# Altium PCB Copy of MB1363.PcbDoc (part 5 of 6)
Units mm, origin at the board's own origin, x right, y up, seen from the top; angles counter-clockwise.
Board outline 60.78 x 109.88 mm, 4 copper layers (Top Layer, Signal Layer 1, Signal Layer 2, Bottom Layer), stack 0.453 mm thick; 231 components, 215 nets, 716 pads, 2915 vias.
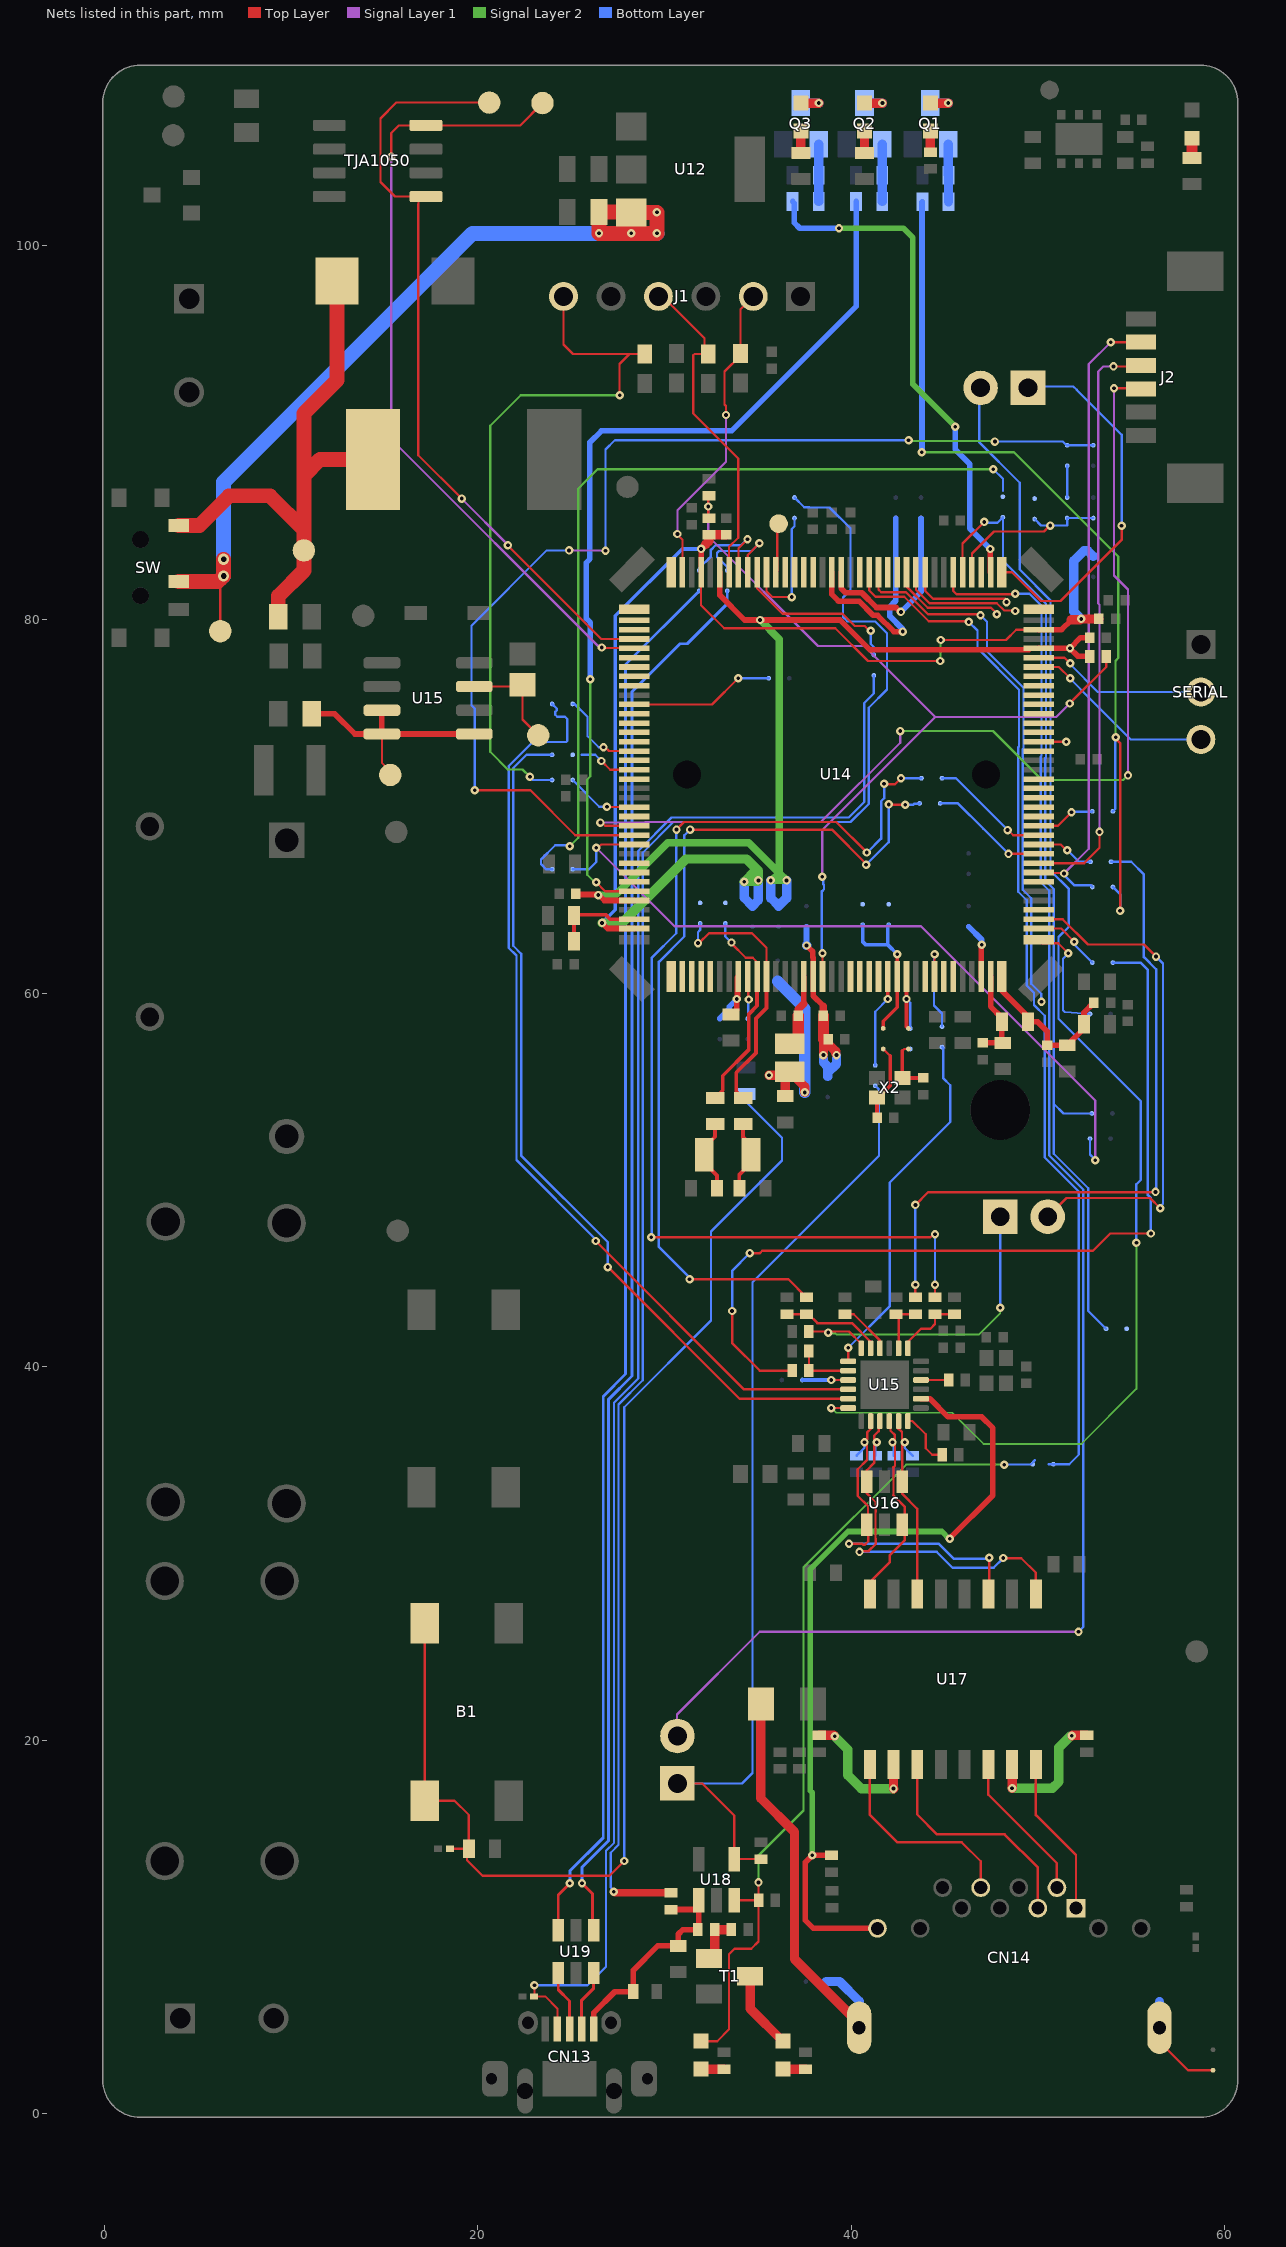
[diagram p6: the nets of this part, all layers, seen from the top]

## Via types
v1: diameter 0.45, hole 0.2, Top Layer to Bottom Layer, tented both sides, 2902 vias
v2: diameter 0.6, hole 0.3, Top Layer to Bottom Layer, tented both sides, 13 vias

## Nets (pads, with @x,y where several pads share a name; then routed paths per layer and width w, separated by ;. In a path a pad name is that pad's centre, name@x,y a point inside that pad or via, vN(x,y) a via of type N, cw(c..) or ccw(c..) an arc to the next point about the centre after c; other vN are vias at no path point) (continued)
NetCN14_12: CN14.12 R60.2 U15.2@43.741,38.279 | length 43.9
  Top Layer w0.3: R60.2@38.941,13.823 38.935,13.829 v1(37.916,13.829) 37.55,13.463 37.55,10.35 37.98,9.92 CN14.12@41.409,9.92 ; U15.2@43.741,38.279 44.216,38.279 45.191,37.304 46.991,37.304 47.586,36.709 47.586,33.111 v1@45.275,30.8
  Signal Layer 2 w0.3: v1(37.916,13.829) 37.916,17.184 37.821,17.279 37.821,29.154 39.836,31.169 44.856,31.169 v1@45.275,30.75
  other v1: 45.275,30.775
NetLD1_1: LD1.1 R28.1 | length 1.1
  Top Layer w0.5: R28.1@44.241,105.029 LD1.1@44.241,106.147
NetLD1_2: LD1.2 Q1.3 | length 1.9
  Top Layer w0.5: LD1.2@44.241,107.647 45.192,107.647 v1(45.199,107.654)
  Bottom Layer w0.5: Q1.3@44.241,107.647 45.192,107.647 v1(45.199,107.654)
NetLD2_1: LD2.1 R27.1 | length 1.2
  Top Layer w0.5: R27.1@40.716,104.979 LD2.1@40.716,106.147
NetLD2_2: LD2.2 Q2.3 | length 1.9
  Top Layer w0.5: LD2.2@40.716,107.647 41.667,107.647 v1(41.674,107.654)
  Bottom Layer w0.5: Q2.3@40.716,107.647 41.667,107.647 v1(41.674,107.654)
NetLD3_1: LD3.1 R26.1 | length 1.2
  Top Layer w0.5: LD3.1@37.308,106.147 37.308,104.987 R26.1@37.316,104.979
NetLD3_2: LD3.2 Q3.3 | length 1.9
  Top Layer w0.5: LD3.2@37.308,107.647 38.259,107.647 v1(38.266,107.654)
  Bottom Layer w0.5: Q3.3@37.308,107.647 38.259,107.647 v1(38.266,107.654)
NetLD5_1: LD5.1 R12.1 | length 1
  Top Layer w0.6: R12.1@58.248,104.718 LD5.1@58.248,105.768
NetLD7_1: LD7.1 R68.1 | length 1.2
  Top Layer w0.5: LD7.1@31.966,2.379 R68.1@33.191,2.379
NetLD8_1: LD8.1 R69.1 | length 1.2
  Top Layer w0.5: LD8.1@36.341,2.379 R69.1@37.566,2.379
NetLD8_2: LD8.2 T1.3 | length 4.2
  Top Layer w0.5: T1.3@34.591,7.354 34.591,5.629 LD8.2@36.341,3.879
NetQ1_1: Q1.1 R71.2 R76.2 | length 3.1
  Bottom Layer w0.5: Q1.1@45.191,105.447 45.191,103.805 R71.2@45.211,103.785 45.214,103.782 R76.2@45.214,102.367
NetQ2_1: Q2.1 R72.2 R74.2 | length 3.1
  Bottom Layer w0.5: R74.2@41.666,102.379 R72.2@41.666,103.779 Q2.1@41.666,105.447
NetQ3_1: Q3.1 R73.2 R75.2 | length 3.1
  Bottom Layer w0.5: Q3.1@38.258,105.447 38.258,103.787 R73.2@38.266,103.779 R75.2@38.266,102.379
NetR3_1: R3.1 TP.1 U15.1@19.825,73.87 U15.7@14.875,75.14 U15.8@14.875,73.87 | length 12.8
  Top Layer w0.12: U15.8@14.875,73.87 14.875,72.328 15.325,71.878 TP.1@15.325,71.675
  Top Layer w0.3: R3.1@11.125,74.95 12.35,74.95 13.43,73.87 U15.8@14.875,73.87 ; U15.7@14.875,75.14 U15.8@14.875,73.87 ; U15.1@19.825,73.87 U15.8@14.875,73.87
NetR37_1: R37.1 R38.1 U14.142 | length 4.7
  Top Layer w0.2: R38.1@25.166,62.779 R37.1@25.166,64.153 25.211,64.198 26.85,64.198 27.094,63.954 U14.142@28.391,63.954
NetR43_1: R43.1 R44.2 U15.11 | length 5.4
  Top Layer w0.127: R43.1@36.566,42.804 R44.2@37.616,42.804 37.716,42.804 38.191,42.329 40.041,42.329 41.041,41.329 U15.11@41.041,40.979
NetR45_1: R45.1 U15.10 | length 2.9
  Top Layer w0.127: R45.1@39.666,42.804 40.141,42.804 41.541,41.404 U15.10@41.541,40.979
NetR46_1: R46.1 R47.2 U15.8@42.541,40.979 | length 2.9
  Top Layer w0.127: U15.8@42.541,40.979 42.541,42.654 R46.1@42.391,42.804 R47.2@43.441,42.804
NetR48_2: R48.2 R49.1 U15.7@43.041,40.979 | length 3.8
  Top Layer w0.127: U15.7@43.041,40.979 43.041,41.329 43.741,42.029 44.241,42.029 44.491,42.279 R48.2@44.491,42.804 R49.1@45.541,42.804
NetR51_1: R51.1 R52.2 U15.14 | length 3.1
  Top Layer w0.12: R51.1@37.741,40.779 R52.2@37.741,39.779 U15.14@39.841,39.779
NetR53_2: R53.2 U15.4@43.741,39.279 | length 1.5
  Top Layer w0.12: U15.4@43.741,39.279 R53.2@45.216,39.279
NetR54_1: R54.1 U15.24 | length 3
  Top Layer w0.12: U15.24@43.041,37.079 43.291,37.079 43.991,36.379 43.991,35.629 44.341,35.279 R54.1@44.866,35.279
NetR55_2: R55.2 U17.10 | length 7.2
  Top Layer w0.5: R55.2@38.291,20.254 39.071,20.254 v1@39.1,20.225 ; U17.10@42.271,18.684 42.271,17.404 v1@42.275,17.4
  Signal Layer 2 w0.5: v1@39.1,20.225 39.825,19.5 39.825,18.125 40.546,17.404 v1(42.266,17.404)
  other v1: 39.116,20.204
NetR56_2: R56.2 U17.15 | length 7.5
  Top Layer w0.5: U17.15@48.621,18.684 48.621,17.429 v1@48.625,17.425 ; v1@51.825,20.225 51.854,20.254 R56.2@52.616,20.254
  Signal Layer 2 w0.5: v1(48.616,17.429) 50.779,17.429 51.125,17.775 51.125,19.6 v1@51.775,20.25
  other v1: 51.816,20.229
NetR63_2: R63.2 SB21.2 | length 93.5
  Top Layer w0.12: v1(27.291,11.879) v1@27.341,11.829
  Top Layer w0.4: v1@27.341,11.829 R63.2@30.366,11.829
  Bottom Layer w0.12: v1(27.291,11.879) 27.291,11.948 27.125,12.114 27.125,13.975 27.55,14.4 27.55,37.975 28.837,39.262 28.837,67.509 30.482,69.155 39.969,69.155 40.94,70.126 40.94,72.613 40.94,75.278 41.916,76.254 41.916,79.261 41.278,79.899 39.798,79.899 39.561,80.136 39.561,81.174 39.966,81.579 39.966,84.879 38.846,85.999 37.771,85.999 37.766,86.004 37.491,86.004 SB21.2@36.966,86.529
NetR65_2: R65.2 R66.2 T1.1 | length 2.6
  Top Layer w0.5: T1.1@32.391,8.304 32.44,8.304 32.69,8.554 32.69,9.853 R65.2@32.691,9.854 R66.2@33.591,9.854
NetR76_1: R76.1 SB54.2 SB65.2 | length 50.9
  Top Layer w0.127: v1(54.175,73.7) 54.175,73.613 54.4,73.388 v1(54.4,64.4)
  Signal Layer 2 w0.12: v1(43.775,88.95) 48.725,88.95 54.3,83.375 54.3,77.932 54.15,77.782 54.15,73.725 v1(54.175,73.7)
  Bottom Layer w0.127: SB65.2@54.016,65.679 54.4,65.295 v1(54.4,64.4) ; SB54.2@54.016,69.729 54.016,69.733 54.15,69.867 54.15,73.675 v1(54.175,73.7)
  Bottom Layer w0.3: v1(43.775,88.95) 43.795,88.97 43.795,102.347 R76.1@43.814,102.367
NetSB15_1: SB15.1 SB16.1 SB103.2 U14.76 | length 9.5
  Top Layer w0.12: U14.76@46.466,82.529 46.466,83.529 47.646,84.709 50.321,84.709 50.641,85.029 v1(50.666,85.029)
  Bottom Layer w0.12: SB103.2@49.825,85.375 50.171,85.029 v1(50.666,85.029) 51.566,85.029 SB16.1@51.566,85.429 SB15.1@52.966,85.429
NetSB17_1: SB17.1 SB94.1 SB104.2 U14.77 | length 52.4
  Top Layer w0.127: U14.77@45.966,82.529 45.966,84.066 v1(47.125,85.225)
  Bottom Layer w0.12: SB17.1@48.125,85.475 48.125,83.15 50.432,80.844 50.432,72.606 50.392,72.567 50.392,66.027 50.845,65.574 50.845,54.075 ; SB94.1@52.891,53.554 51.366,53.554 50.845,54.075 ; SB104.2@53.65,42.025 52.7,42.975 52.7,49.542 50.845,51.397 50.845,54.075
  Bottom Layer w0.127: v1(47.125,85.225) 47.171,85.179 47.829,85.179 SB17.1@48.125,85.475
NetSB18_1: SB18.1 U14.90 | length 10.1
  Top Layer w0.3: U14.90@39.466,82.529 39.466,81.672 39.704,81.434 40.57,81.434 41.36,80.644 42.401,80.644 42.666,80.379 v1(42.666,80.404)
  Bottom Layer w0.3: v1(42.666,80.404) 43.741,81.479 SB18.1@43.741,85.429
NetSB19_1: SB19.1 U14.91 | length 12.3
  Top Layer w0.3: U14.91@38.966,82.529 38.966,81.342 39.323,80.985 40.425,80.985 41.186,80.224 41.421,80.224 42.291,79.354 v1(42.766,79.354)
  Bottom Layer w0.3: SB19.1@42.391,85.429 42.391,81.004 42.066,80.679 42.066,80.179 42.766,79.479 v1(42.766,79.354)
NetSB32_1: SB32.1 U14.119 | length 7.8
  Top Layer w0.12: U14.119@28.391,75.454 32.554,75.454 v1(33.95,76.85)
  Bottom Layer w0.12: v1(33.95,76.85) 33.952,76.852 35.589,76.852 SB32.1@35.591,76.854
NetSB68_2: SB68.2 U14.34 | length 3
  Top Layer w0.3: U14.34@46.966,60.879 46.966,62.554 v1(46.991,62.579)
  Bottom Layer w0.3: SB68.2@46.291,63.554 46.991,62.854 v1(46.991,62.579)
NetSB98_2: SB98.2 U15.15 | length 2.5
  Top Layer w0.12: v1(38.941,39.279) U15.15@39.841,39.279
  Bottom Layer w0.2: SB98.2@37.391,39.279 v1(38.941,39.279)
OSC32_IN: C77.1 R41.2 X3.2 | length 4
  Top Layer w0.12: X3.2@32.066,50.979 32.066,51.257 X3.2@32.141,51.332 X3.2@32.141,51.729
  Top Layer w0.2: X3.2@32.066,50.979 32.816,50.229 C77.1@32.816,49.554 ; X3.2@32.141,51.729 32.716,52.304 R41.2@32.716,52.979
OSC32_OUT: C78.1 R42.1 X3.1 | length 3.9
  Top Layer w0.12: X3.1@34.641,50.904 X3.1@34.641,51.332
  Top Layer w0.2: C78.1@34.016,49.554 34.016,50.279 X3.1@34.641,50.904 ; R42.1@34.216,52.979 34.216,52.284 34.641,51.859 X3.1@34.641,51.332
OSC_IN: C76.1 SB3.2 X2.1 | length 4.2
  Top Layer w0.12: X2.1@41.391,54.404 X2.1@41.396,54.404 ; SB3.2@41.716,57.004 42.096,56.624
  Top Layer w0.2: C76.1@41.391,53.329 X2.1@41.391,54.404 ; X2.1@41.396,54.404 41.452,54.404 42.096,55.048 42.096,56.624
OSC_OUT: C74.1 SB4.2 X2.3 | length 2.9
  Top Layer w0.12: 42.741,56.904 42.841,57.004 SB4.2@43.066,57.004
  Top Layer w0.2: 42.741,56.904 X2.3@42.741,55.454 C74.1@43.866,55.454
PA0: SB81.2 U14.37 | length 6.5
  Top Layer w0.12: U14.37@50.041,62.854 50.231,62.664 51.086,62.664 v1(51.625,62.125)
  Bottom Layer w0.12: v1(51.625,62.125) 51.625,62.115 51.344,61.834 51.344,59.076 51.441,58.979 SB81.2@52.791,58.879
PA1: SB80.1 U14.38 | length 3.7
  Top Layer w0.12: U14.38@50.041,63.454 51.246,63.454 v1(51.95,62.75)
  Bottom Layer w0.12: v1(51.95,62.75) 52.013,62.687 52.013,62.532 SB80.1@52.916,61.629
PA2: JP7.2 U14.39 | length 27.5
  Top Layer w0.12: JP7.2@50.526,48.024 51.527,49.025 56,49.025 v1(56.55,48.475)
  Top Layer w0.127: U14.39@50.041,63.954 51.324,63.954 52.678,62.6 55.675,62.6 v1(56.325,61.95)
  Bottom Layer w0.12: v1(56.325,61.95) 56.7,61.575 56.7,48.71 56.55,48.56 v1(56.55,48.475)
PA3: U14.40
PA4: U14.43
PA5: J2.5 SB65.1 U14.44 | length 34.4
  Top Layer w0.12: v1(51.4,66.4) v1@51.441,66.359 ; v1(53.9,94.85) J2.5@55.525,94.85
  Top Layer w0.127: U14.44@50.041,66.454 50.068,66.427 51.373,66.427 v1(51.4,66.4)
  Signal Layer 1 w0.12: v1(51.4,66.4) 52.725,67.725 52.725,93.675 v1(53.9,94.85)
  Bottom Layer w0.127: v1(51.4,66.4) 51.4,66.317 51.938,65.779 52.816,65.779 SB65.1@52.916,65.679
PA6: J2.4 U14.45 | length 31.6
  Top Layer w0.12: v1(54.05,93.55) 55.475,93.55 J2.4@55.525,93.6
  Top Layer w0.127: U14.45@50.041,66.954 52.479,66.954 53.3,67.775 v1(53.3,68.625)
  Signal Layer 1 w0.12: v1(53.3,68.625) 53.3,80.786 53.225,80.861 53.225,93.275 53.5,93.55 v1(54.05,93.55)
PA7: SB52.1 U14.46 | length 6.4
  Top Layer w0.12: v1(48.425,67.45) v1(48.425,67.45) 50.039,67.452 U14.46@50.041,67.454
  Bottom Layer w0.12: 47.071,68.804 v1(48.425,67.45)
  Bottom Layer w0.127: SB52.1@44.766,70.154 45.721,70.154 47.071,68.804
PA8: TP4.1 U14.97 | length 2.7
  Top Layer w0.12: U14.97@35.966,82.529 36.041,82.604 36.041,85.054 TP4.1@36.116,85.129
PA9: SB21.1 U14.98 | length 6.8
  Top Layer w0.12: U14.98@35.466,82.529 35.466,81.504 35.77,81.2 v1(36.825,81.2)
  Bottom Layer w0.12: v1(36.825,81.2) 36.825,84.846 36.966,84.987 SB21.1@36.966,85.429
PA10: SB29.1 U14.99 | length 9.3
  Top Layer w0.12: U14.99@34.966,82.529 34.966,81.664 36.325,80.305 39.539,80.305 40.197,79.647 40.724,79.647 40.971,79.4 v1(41.05,79.4)
  Bottom Layer w0.12: v1(41.05,79.4) 41.05,78.691 41.216,78.525 SB29.1@41.216,78.104
PA11: SB26.1 U14.100 | length 5.5
  Top Layer w0.127: U14.100@34.466,82.529 34.466,83.454 v1(35.091,84.079)
  Bottom Layer w0.127: SB26.1@33.366,82.629 33.366,82.804 32.816,83.354 32.816,83.554 32.933,83.67 34.683,83.67 v1(35.091,84.079) v1@35.116,84.079
PA12: SB27.1 U14.101 | length 5.5
  Top Layer w0.127: U14.101@33.966,82.529 33.966,83.816 v1(34.45,84.3)
  Bottom Layer w0.127: SB27.1@31.866,82.629 31.866,82.754 32.491,83.379 32.491,83.726 32.744,83.979 34.094,83.979 34.415,84.3 v1(34.45,84.3)
PA13: D2.1 J1.4 U14.102 | length 18
  Top Layer w0.12: J1.4@29.68,97.3 29.9,97.3 32.148,95.052 32.148,94.415 D2.1@32.35,94.213 31.62,94.213 31.55,94.142 31.55,91.025 31.575,91 33.95,88.625 33.95,84.373 33.466,83.889 U14.102@33.466,82.529
PA14: D1.1 J1.2 U14.107 | length 16.6
  Top Layer w0.12: v1(30.7,84.575) 30.7,84.534 30.966,84.268 U14.107@30.966,82.529 ; v1(33.3,90.95) 33.3,91.431 33.225,91.506 33.225,93.278 34.075,94.128 D1.1@34.075,94.238 34.075,96.615 J1.2@34.76,97.3
  Signal Layer 1 w0.12: v1(30.7,84.575) 30.7,85.85 33.3,88.45 v1(33.3,90.95)
PA15: U14.108
PB0: SB54.1 U14.49 | length 3.2
  Top Layer w0.127: U14.49@50.041,68.954 51.079,68.954 v1(51.8,69.675)
  Bottom Layer w0.127: v1(51.8,69.675) 51.83,69.705 52.892,69.705 SB54.1@52.916,69.729
PB1: U14.50
PB2: U14.51
PB3: SB50.2 U14.130 | length 3.9
  Top Layer w0.12: v1(26.925,69.975) 26.936,69.964 28.38,69.964 U14.130@28.391,69.954
  Bottom Layer w0.12: SB50.2@25.091,71.404 26.52,69.975 v1(26.925,69.975)
PB4: U14.131
PB5: J2.3 U14.132 | length 56.2
  Top Layer w0.12: v1(26.575,69.125) 26.664,69.125 26.835,68.954 U14.132@28.391,68.954 ; v1(54.075,92.375) 55.5,92.375 J2.3@55.525,92.35
  Signal Layer 1 w0.12: v1(26.575,69.125) 28.952,69.125 28.982,69.155 38.38,69.155 42.625,73.4 v1(42.625,74.025) ; v1(54.075,92.375) 54.075,82.356 54.825,81.606 v1(54.825,71.65)
  Signal Layer 2 w0.12: v1(42.625,74.025) 47.6,74.025 50.225,71.4 54.575,71.4 v1(54.825,71.65)
PB6: SB11.2 SB12.2 U14.133 | length 59.1
  Top Layer w0.12: v1(19.845,70.854) 22.832,70.854 25.231,68.454 U14.133@28.391,68.454
  Signal Layer 1 w0.12: v1(24.9,83.7) 24.913,83.688 26.838,83.688 v1(26.85,83.675)
  Signal Layer 2 w0.12: v1(43.075,89.6) 43.113,89.563 47.663,89.563 v1(47.7,89.525)
  Bottom Layer w0.12: v1(19.845,70.854) 19.845,75.229 19.68,75.394 19.68,79.68 23.7,83.7 v1(24.9,83.7) ; v1(26.85,83.675) 26.85,89.1 27.35,89.6 v1(43.075,89.6) ; v1(47.7,89.525) 51.334,89.525 51.53,89.329 SB11.2@52.966,89.329
PB7: SB64.2 SB96.2 U14.134 | length 41.1
  Top Layer w0.12: v1(26.35,67.775) 26.439,67.775 26.618,67.954 U14.134@28.391,67.954
  Signal Layer 1 w0.12: v1(26.35,67.775) 30.546,63.579 43.738,63.579 53.075,54.243 v1(53.075,51.05)
  Bottom Layer w0.12: SB64.2@25.091,66.629 25.966,66.629 26.35,67.013 v1(26.35,67.775)
  Bottom Layer w0.127: SB96.2@52.791,52.204 52.791,51.354 53.075,51.07 v1(53.075,51.05)
PB8: U14.136
PB9: U14.137
PB10: SERIAL.3 U14.66 | length 10.3
  Top Layer w0.12: U14.66@50.041,77.454 51.121,77.454 v1(51.725,76.85)
  Bottom Layer w0.12: v1(51.725,76.85) 51.725,76.825 52.775,75.775 54.975,73.575 SERIAL.3@58.725,73.575
PB11: SERIAL.2 U14.67 | length 9.5
  Top Layer w0.12: U14.67@50.041,77.954 51.421,77.954 v1(51.725,77.65)
  Bottom Layer w0.12: v1(51.725,77.65) 51.725,77.6 53.21,76.115 SERIAL.2@58.725,76.115
PB12: U14.72
PB13: JP6.1 U14.73 | length 20.1
  Top Layer w0.127: U14.73@48.066,82.529 48.616,82.529 50.158,80.987 51.207,80.987 54.48,84.26 v1(54.48,85.025)
  Bottom Layer w0.12: JP6.1@49.47,92.474 51.896,92.474 52.076,92.294
  Bottom Layer w0.127: 52.076,92.294 54.48,89.89 v1(54.48,85.025)
PB14: R75.1 U14.74 | length 27.5
  Top Layer w0.12: v1(47.45,83.775) v1@47.458,83.767 ; U14.74@47.458,82.537 U14.74@47.466,82.529
  Top Layer w0.3: U14.74@47.458,82.537 v1@47.458,83.767
  Signal Layer 2 w0.3: v1(39.35,100.95) 42.8,100.95 43.3,100.45 43.3,92.6 v1(45.575,90.325)
  Bottom Layer w0.3: R75.1@36.866,102.379 36.95,102.295 36.95,101.25 37.25,100.95 v1(39.35,100.95) ; v1(45.575,90.325) 45.575,89.1 46.35,88.325 46.35,84.875 v1(47.45,83.775)
PB15: U14.75
PC0: U14.28
PC1: SB84.2 U14.29 | length 5.3
  Top Layer w0.127: U14.29@44.466,60.879 v1(44.466,62.079)
  Bottom Layer w0.12: v1(44.466,62.079) 44.436,62.049 44.436,59.336 44.866,58.906 SB84.2@44.866,58.204
PC2: U14.30
PC3: U14.31
PC4: SB63.2 U14.47 | length 3.2
  Top Layer w0.12: U14.47@50.041,67.954 51.221,67.954 51.525,67.65 v1(51.575,67.65)
  Bottom Layer w0.127: v1(51.575,67.65) 52.196,67.029 SB63.2@52.816,67.029
PC5: SB48.2 U14.48 | length 6.5
  Top Layer w0.12: v1(48.375,68.725) 48.406,68.725 48.677,68.454 U14.48@50.041,68.454
  Bottom Layer w0.12: SB48.2@44.866,71.504 45.616,71.504 48.375,68.745 v1(48.375,68.725)
PC6: U14.93
PC7: U14.94
PC8: U14.95
PC9: U14.96
PC10: U14.109
PC11: U14.110
PC12: U14.111
PC13: SB82.2 U14.9 | length 2.3
  Top Layer w0.12: U14.9@34.466,60.879 34.493,60.852 34.493,59.681 v1(34.52,59.654)
  Bottom Layer w0.127: SB82.2@34.466,58.629 34.49,58.653 34.49,59.624 v1(34.52,59.654)
PC14: SB66.1
PC14-MCU: R41.1 SB66.2 U14.10 | length 11.2
  Top Layer w0.12: v1(33.592,62.704) 33.592,62.653 34.361,61.884 34.736,61.884 34.966,61.654 U14.10@34.966,60.879
  Top Layer w0.2: R41.1@32.716,54.379 33.125,54.788 33.125,55.575 34.525,56.975 34.525,58.875 34.966,59.316 U14.10@34.966,60.879
  Bottom Layer w0.12: SB66.2@33.266,63.729 33.266,63.03 v1(33.592,62.704)
PC15: SB67.1
PC15-MCU: R42.2 SB67.2 U14.11 | length 14.2
  Top Layer w0.127: v1(31.8,62.675) 31.862,62.675 32.391,63.204 34.69,63.204 35.466,62.428 U14.11@35.466,60.879
  Top Layer w0.2: R42.2@34.216,54.379 33.85,54.745 33.85,55.738 34.9,56.788 34.9,58.638 35.466,59.204 U14.11@35.466,60.879
  Bottom Layer w0.127: v1(31.8,62.675) 31.8,63.258 31.916,63.374 SB67.2@31.916,63.729
PD0: CAN_TX.1 TJA1050.1 U14.112 | length 42.1
  Top Layer w0.12: v1(19.15,86.475) 16.825,88.8 16.825,102.235 16.83,102.24 16.83,102.411 17.064,102.645 TJA1050.1@17.235,102.645 15.58,102.645 14.8,103.425 14.8,106.825 15.65,107.675 CAN_TX.1@20.625,107.675 ; v1(21.625,83.975) 21.625,83.95 26.621,78.954 U14.112@28.391,78.954
  Signal Layer 1 w0.12: v1(19.15,86.475) 19.15,86.463 21.625,83.988 v1(21.625,83.975)
PD1: CAN_RX.1 TJA1050.4 U14.113 | length 42.8
  Top Layer w0.12: v1(15.375,104.775) 15.375,106.05 15.78,106.455 TJA1050.4@17.235,106.455 22.28,106.455 CAN_RX.1@23.475,107.65 ; v1(26.65,78.5) 26.673,78.477 28.368,78.477 U14.113@28.391,78.454
  Signal Layer 1 w0.12: v1(15.375,104.775) 15.375,89.652 26.422,78.605 26.456,78.605 26.561,78.5 v1(26.65,78.5)
PD2: U14.114
PD3: U14.115
PD4: U14.116
PD5: U14.117
PD6: U14.120
PD7: U14.121
PD8: SB103.1
PD9: SB104.1
PD10: JP8.2 U14.78 | length 86.6
  Top Layer w0.12: U14.78@45.466,82.529 45.466,81.529 45.641,81.354 48.791,81.354 v1(48.791,81.379)
  Signal Layer 1 w0.12: JP8.2@30.675,20.22 30.675,21.375 35.1,25.8 v1(52.175,25.8)
  Bottom Layer w0.12: v1(48.791,81.379) 49.555,81.379 50.192,80.742 50.192,72.705 50.152,72.666 50.152,65.928 50.605,65.475 50.605,51.295 52.425,49.475 52.425,26.05 v1(52.175,25.8)
PD11: U14.81 | length 5.7
  Top Layer w0.12: U14.81@43.966,82.529 43.966,81.529 44.381,81.114 48.256,81.114 48.391,80.979 48.366,80.979 v1(48.318,80.93)
PD12: U14.82 | length 6.7
  Top Layer w0.12: U14.82@43.466,82.529 43.466,81.604 44.196,80.874 47.801,80.874 48.196,80.479 48.769,80.479 v1(48.793,80.455)
PD13: U14.83 | length 6.2
  Top Layer w0.12: U14.83@42.966,82.529 42.966,81.764 44.097,80.634 47.489,80.634 47.793,80.33 v1(47.793,80.28)
PD14: U14.84
PD15: U14.85
PE0: U14.138
PE1: R74.1 U14.139 | length 49.2
  Top Layer w0.12: v1(26.348,65.932) 26.826,65.454 U14.139@28.391,65.454
  Signal Layer 2 w0.12: v1(26.036,76.8) 26.036,71.602 25.871,71.437 25.871,66.329 26.268,65.932 v1(26.348,65.932)
  Bottom Layer w0.3: v1(26.036,76.8) 26.036,79.839 25.825,80.05 25.825,83.048 26.015,83.238 26.015,89.49 26.625,90.1 33.6,90.1 40.266,96.766 R74.1@40.266,102.379
PE2: U14.1
PE3: U14.2
PE4: U14.3
PE5: U14.4
PE6: U14.5
PE7: U14.57
PE8: U14.58 | length 1.5
  Top Layer w0.12: U14.58@50.041,73.454 v1(51.516,73.454)
PE9: U14.59
PE10: U14.60
PE11: U14.61
PE12: U14.62
PE13: U14.63
PE14: U14.64
PE15: U14.65
PF6: U14.20
PF7: U14.21
PF8: U14.22
PF9: U14.23
PF10: SB91.1 U14.24 | length 5
  Top Layer w0.2: v1(41.966,59.679) U14.24@41.966,60.879
  Bottom Layer w0.12: SB91.1@41.291,56.129 41.291,59.004 v1(41.966,59.679)
PF11: U14.52
PF14: U14.53
PF15: U14.54
PG6: U14.86 | length 29
  Top Layer w0.12: U14.86@41.466,82.529 41.466,81.604 41.616,81.454 42.937,81.454 44.116,80.275 46.879,80.275 v1(46.925,80.229)
  Bottom Layer w0.12: v1(46.925,80.229) 47.275,79.879 47.275,78.3 49.232,76.344 49.232,73.103 49.192,73.064 49.192,65.53 49.645,65.077 49.645,60.5 50.179,59.966 50.179,59.541 v1(50.191,59.529)
PG7: SB100.2 U14.87 | length 55.9
  Top Layer w0.12: U14.87@40.966,82.529 40.966,81.554 41.306,81.214 42.838,81.214 44.152,79.9 46.27,79.9 v1(46.3,79.87)
  Bottom Layer w0.12: v1(46.3,79.87) 46.762,79.408 46.762,78.474 48.992,76.244 48.992,73.202 48.952,73.163 48.952,65.415 49.405,64.963 49.405,60.401 49.786,60.02 49.786,59.361 50.365,58.782 50.365,51.196 52.185,49.376 52.185,35.285 51.675,34.775 SB100.2@50.825,34.775 50.575,34.775
PG8: U14.88
PG9: U14.122
PG10: U14.123
PG11: SB36.2 U14.124 | length 5
  Top Layer w0.12: v1(26.742,73.155) 26.831,73.155 27.032,72.954 U14.124@28.391,72.954
  Bottom Layer w0.12: SB36.2@25.091,75.479 25.191,75.479 25.891,74.779 25.891,73.743 26.48,73.155 v1(26.742,73.155)
PG12: U14.125
PG13: SB46.2 U14.126 | length 3.2
  Top Layer w0.12: v1(26.63,72.425) 27.101,71.954 U14.126@28.391,71.954
  Bottom Layer w0.12: 25.566,72.754 26.301,72.754 v1(26.63,72.425)
PG14: U14.127
PH0: SB71.2
PH0-MCU: SB3.1 SB71.1 SB72.1 U14.25 | length 8.4
  Top Layer w0.2: SB3.1@41.716,58.104 41.716,58.491 42.466,59.241 U14.25@42.466,60.879 v1(42.466,62.079)
  Bottom Layer w0.2: SB72.1@40.616,63.654 40.616,62.754 40.791,62.579 41.966,62.579 ; SB71.1@42.016,63.654 41.966,63.604 41.966,62.579 ; v1(42.466,62.079) 41.966,62.579
PH1: SB90.2
PH1-MCU: SB4.1 SB90.1 U14.26 | length 4.6
  Top Layer w0.127: U14.26@42.916,60.829 U14.26@42.966,60.879 ; 42.966,58.204 SB4.1@43.066,58.104
  Top Layer w0.2: 42.966,58.204 U14.26@42.966,60.879
  Signal Layer 2 w0.127: v1@42.966,59.576 v1(42.966,59.679)
  Bottom Layer w0.127: v1(42.966,59.679) 43.166,59.479 SB90.1@43.166,58.104
RD_N: R79.1 U15.22 U16.6 U17.8 | length 11.5
  Top Layer w0.11: 42.266,33.105 42.266,34.604
  Top Layer w0.13: U17.8@41.001,27.834 41.066,27.899 41.066,28.516 42.059,29.509 42.059,29.884 42.866,30.691 42.866,31.404 U16.6@42.741,31.529 42.866,31.654 42.866,32.505 42.266,33.105 ; U15.22@42.041,37.079 42.109,37.011 42.109,36.561 42.341,36.329 42.341,36.079 v1(42.216,35.954) 42.35,35.82 42.35,34.688 42.266,34.604
  Bottom Layer w0.13: R79.1@42.291,35.229 42.291,35.879 v1(42.216,35.954) v1@42.35,35.954
RD_P: R78.1 U15.23 U16.1 U17.6 | length 10.7
  Top Layer w0.13: U15.23@42.541,37.079 42.491,37.029 42.491,36.719 42.723,36.487 42.723,36.097 v1(42.866,35.954) 42.732,35.82 42.732,33.838 U16.1@42.741,33.829 42.741,33.181 43.541,32.381 U17.6@43.541,27.834
  Bottom Layer w0.13: v1(42.866,35.954) 42.866,35.654 R78.1@43.291,35.229
RMII_CRS_DV: R44.1 SB52.2 | length 47.8
  Top Layer w0.127: v1(31.35,44.675) 36.645,44.675 R44.1@37.616,43.704 ; v1(31.375,68.75) 38.975,68.75 40.8,66.925 v1(40.8,66.875) ; v1(42.012,70.1) 42.022,70.09 42.892,70.09 v1(42.902,70.08)
  Bottom Layer w0.127: v1(31.35,44.675) 31.35,44.761 29.709,46.402 29.709,61.668 31.066,63.026 31.066,68.441 v1(31.375,68.75) ; v1(40.8,66.875) 40.805,66.875 42.012,68.083 v1(42.012,70.1) ; v1(42.902,70.08) 43.318,70.08 43.368,70.13 43.642,70.13 SB52.2@43.666,70.154
RMII_MDC: SB84.1 U15.13 | length 19.3
  Top Layer w0.127: U15.13@39.841,40.279 v1(39.841,41.004)
  Bottom Layer w0.127: v1(39.841,41.004) 42.058,43.221 42.058,49.846 45.305,53.093 45.305,55.065 44.941,55.429 44.941,57.029 SB84.1@44.866,57.104
RMII_MDIO: JP7.1 R50.1 U15.12 | length 18.2
  Top Layer w0.127: R50.1@37.741,41.879 38.716,41.879 v1(38.775,41.82) ; v1@38.775,41.879 39.887,41.879 40.541,41.225 U15.12@40.541,40.979
  Signal Layer 2 w0.102: v1(38.775,41.82) 38.824,41.771 39.153,41.771 39.204,41.72 46.858,41.72 47.986,42.849 v1(47.986,43.149)
  Bottom Layer w0.127: v1(47.986,43.149) JP7.1@47.986,48.024
RMII_REF_CLK: R52.1 SB80.2 | length 47.2
  Top Layer w0.127: v1(33.625,42.975) 33.625,41.27 35.116,39.779 R52.1@36.841,39.779 ; v1(34.575,46.075) 35.116,46.074 35.241,46.2 52.95,46.2 53.875,47.125 v1(56.05,47.125)
  Bottom Layer w0.127: v1(33.625,42.975) 33.625,45.125 v1(34.575,46.075) ; SB80.2@54.016,61.629 55.496,61.629 55.887,61.239 55.887,49.181 56.05,49.017 v1(56.05,47.125)
RMII_RXD0: R47.1 SB63.1 | length 37.4
  Top Layer w0.127: R47.1@43.441,43.704 v1(43.441,44.379) ; v1(43.441,48.654) 44.116,49.329 56.274,49.329 v1(56.295,49.35)
  Bottom Layer w0.127: v1(43.441,44.379) v1(43.441,48.654) ; SB63.1@53.916,67.029 54.996,67.029 55.675,66.35 55.675,61.925 56.334,61.267 56.334,49.389 v1(56.295,49.35)
RMII_RXD1: R48.1 SB48.1 | length 58.3
  Top Layer w0.127: v1(29.3,46.925) 44.25,46.925 44.404,47.079 v1(44.491,47.079) ; v1(30.65,68.75) 31.059,69.159 39.207,69.159 v1(40.842,67.524) ; v1(41.765,71.2) 41.785,71.18 42.344,71.18 v1(42.668,71.504) ; R48.1@44.491,43.704 v1(44.491,44.379)
  Bottom Layer w0.127: v1(29.3,46.925) 29.331,46.956 29.331,61.895 30.639,63.203 30.639,68.739 v1(30.65,68.75) ; v1(40.842,67.524) 40.861,67.524 41.604,68.266 41.604,70.269 41.765,70.431 v1(41.765,71.2) ; v1(42.668,71.504) SB48.1@43.766,71.504 ; v1(44.491,44.379) v1(44.491,47.079)
RMII_TX_EN: SB36.1 U15.16 | length 50.5
  Top Layer w0.127: v1(26.325,46.725) 34.271,38.779 U15.16@39.841,38.779
  Bottom Layer w0.127: SB36.1@23.991,75.479 24.234,75.236 24.234,75.131 24.158,75.055 24.158,74.903 24.265,74.795 24.675,74.795 24.8,74.67 24.8,73.512 24.726,73.437 22.95,73.437 21.659,72.146 21.659,62.427 22.081,62.005 22.081,51.055 26.325,46.811 v1(26.325,46.725)
RMII_TXD0: SB46.1 U15.17 | length 47
  Top Layer w0.127: v1(26.975,45.325) 34.021,38.279 U15.17@39.841,38.279
  Bottom Layer w0.127: SB46.1@23.991,72.754 22.616,72.754 21.906,72.043 21.906,62.529 22.328,62.107 22.328,51.3 26.975,46.653 v1(26.975,45.325)
RMII_TXD1: JP6.2 U15.18 | length 76.6
  Top Layer w0.127: v1(38.941,37.779) U15.18@39.841,37.779
  Signal Layer 2 w0.102: v1(38.941,37.779) 39.191,37.529 45.416,37.529 46.166,36.779 47.091,35.854 52.329,35.854 55.275,38.8 v1(55.275,46.625)
  Bottom Layer w0.127: JP6.2@46.85,92.025 46.85,89.5 49.025,87.325 49.025,82.675 50.675,81.025 50.675,66.547 51.659,65.564 51.659,63.552 51.1,62.993 51.1,58.625 55.509,54.217 55.509,49.995 55.275,49.762 v1(55.275,46.625)
RX_N: CN14.6 U17.9 | length 11.1
  Top Layer w0.13: U17.9@41.001,18.684 41.001,15.999 42.475,14.525 45.925,14.525 46.939,13.511 CN14.6@46.939,12.1
RX_P: CN14.3 U17.11 | length 12.5
  Top Layer w0.13: U17.11@43.541,18.684 43.541,16.016 44.607,14.95 48.22,14.95 49.999,13.171 CN14.3@49.999,11
SHGND: C90.1 CN14.SH1 CN14.SH2 SB101.1 SB102.1 | length 28.9
  Top Layer w0.12: CN14.SH1@56.509,4.6 56.509,3.85 58.033,2.325 SB102.1@59.375,2.325
  Top Layer w0.5: C90.1@35.166,21.929 35.166,16.884 36.966,15.084 36.966,8.284 CN14.SH2@40.45,4.8
  Bottom Layer w0.45: CN14.SH2@40.35,4.6 CN14.SH2@40.429,4.6
  Bottom Layer w0.5: SB101.1@38.675,7.075 39.375,7.075 40.429,6.021 CN14.SH2@40.429,4.6 ; CN14.SH2@40.35,4.6 CN14.SH2@40.4,4.55 ; CN14.SH1@56.509,4.6 CN14.SH1@56.509,5.984 ; CN14.SH1@56.525,4.625 CN14.SH1@56.525,4.85
STLK_MCO: SB72.2
T_SWO: D4.1 J1.6 SB50.1 | length 38.6
  Top Layer w0.12: J1.6@24.6,97.3 24.6,94.725 25.113,94.213 28.137,94.213 ; v1(27.61,92.005) 27.6,92.015 27.6,93.675 28.137,94.213 ; D4.1@28.95,94.213 28.137,94.213
  Signal Layer 2 w0.12: v1(22.8,71.575) 22.405,71.97 21.617,71.97 20.675,72.912 20.675,90.375 22.305,92.005 v1(27.61,92.005)
  Bottom Layer w0.12: v1(22.8,71.575) 22.971,71.404 SB50.1@23.991,71.404
T_VCP_RX: SB17.2 SB64.1 | length 46.2
  Signal Layer 2 w0.12: v1(24.935,67.86) 25.391,68.316 25.391,87.016 26.425,88.05 v1(47.608,88.05)
  Bottom Layer w0.12: SB64.1@23.991,66.629 23.666,66.629 23.391,66.904 23.391,67.147 24.156,67.912 24.883,67.912 v1(24.935,67.86) ; v1(47.608,88.05) 48.125,87.533 48.125,86.875
T_VCP_TX: SB12.1 SB16.2 | length 1.7
  Bottom Layer w0.12: SB16.2@51.566,86.529 SB12.1@51.566,88.229
TD_N: R81.1 U15.20 U16.4 U17.3 | length 19
  Top Layer w0.13: v1(39.886,30.519) 39.888,30.521 40.584,30.521 40.635,30.47 40.742,30.47 40.916,30.644 40.916,31.454 U16.4@40.841,31.529 40.901,31.589 40.901,32.53 40.356,33.075 40.356,34.506 40.85,35 40.85,35.82 v1(40.716,35.954) 40.859,36.097 40.859,36.462 41.091,36.694 41.091,37.029 U15.20@41.041,37.079 ; U17.3@47.351,27.834 47.4,27.883 v1(47.4,29.76)
  Bottom Layer w0.13: v1(39.886,30.519) 39.888,30.521 44.679,30.521 45.5,29.7 47.34,29.7 v1(47.4,29.76) ; R81.1@40.291,35.229 40.716,35.654 v1(40.716,35.954)
TD_P: R80.1 U15.21 U16.3 U17.1 | length 20.4
  Top Layer w0.11: 41.316,30.779 41.316,32.216
  Top Layer w0.13: v1(40.45,30.075) 40.498,30.123 40.935,30.123 41.316,30.504 41.316,30.779 ; 41.316,32.216 41.316,32.732 40.841,33.207 U16.3@40.841,33.829 40.841,34.45 41.232,34.841 41.232,35.82 v1(41.366,35.954) 41.241,36.079 41.241,36.304 41.473,36.536 41.473,37.011 U15.21@41.541,37.079 ; v1(48.15,29.75) 48.161,29.739 49.111,29.739 49.891,28.959 U17.1@49.891,27.834
  Bottom Layer w0.13: v1(40.45,30.075) 44.585,30.075 45.435,29.225 47.625,29.225 v1(48.15,29.75) ; R80.1@41.291,35.229 41.291,35.879 v1(41.366,35.954)
TIME_CAP: C2.1 TP2.1 U15.3@19.825,76.41 | length 5.7
  Top Layer w0.12: U15.3@19.825,76.41 22.31,76.41 C2.1@22.4,76.5 22.4,74.65 TP2.1@23.25,73.8
TX_N: CN14.2 U17.14 | length 8.1
  Top Layer w0.13: U17.14@47.351,18.684 47.351,17.074 51.019,13.406 CN14.2@51.019,12.1
TX_P: CN14.1 U17.16 | length 8.6
  Top Layer w0.13: U17.16@49.891,18.684 49.891,15.987 52.039,13.839 CN14.1@52.039,11
USB_FS_CN_N: CN13.2 U19.6 | length 3.3
  Top Layer w0.155: CN13.2@25.573,4.539 25.573,6.073 26.216,6.716 U19.6@26.216,7.529
USB_FS_CN_P: CN13.3 U19.4 | length 3.2
  Top Layer w0.155: U19.4@24.316,7.529 24.316,6.634 24.923,6.027 CN13.3@24.923,4.539
USB_FS_ID: CN13.4 SB29.2 U22.1 | length 88.1
  Top Layer w0.12: v1(23.041,6.879) 23.041,6.291 U22.1@23.029,6.279 23.616,6.279 24.273,5.622 CN13.4@24.273,4.539
  Bottom Layer w0.12: v1(23.041,6.879) 25.891,6.879 26.875,7.863 26.875,14.075 27.31,14.51 27.31,38.074 28.597,39.361 28.597,67.609 30.383,69.395 39.87,69.395 40.7,70.225 40.7,75.525 41.216,76.041 SB29.2@41.216,77.004
USB_FS_N: SB26.2 U19.1 | length 75.4
  Top Layer w0.155: v1(25.591,12.336) 26.155,11.772 26.155,9.89 U19.1@26.216,9.829
  Bottom Layer w0.155: v1(25.591,12.336) 25.591,13.191 27,14.6 27,38.225 28.275,39.5 28.275,76.131 30.843,78.699 31.221,78.699 33.366,80.844 SB26.2@33.366,81.529
USB_FS_OVCR: LD7.2 R64.1 SB100.1 U18.3 | length 44.8
  Top Layer w0.12: LD7.2@31.966,3.879 32.829,3.879 33.466,4.516 33.466,8.541 33.75,8.825 34.65,8.825 35.041,9.216 R64.1@35.041,11.424 ; U18.3@33.741,11.424 R64.1@35.041,11.424 ; v1(35.041,12.379) R64.1@35.041,11.424
  Signal Layer 2 w0.12: v1@35.044,12.381 35.044,13.819 37.45,16.225 37.45,29.25 42.95,34.75 v1(48.2,34.75)
  Bottom Layer w0.12: v1(48.2,34.75) 49.606,34.75 49.85,34.994
USB_FS_P: SB27.2 U19.3 | length 74.8
  Top Layer w0.155: U19.3@24.316,9.829 24.316,11.711 v1(24.941,12.336)
  Bottom Layer w0.155: v1(24.941,12.336) 24.953,12.349 24.953,13.003 26.725,14.775 26.725,38.4 27.925,39.6 27.925,77.588 SB27.2@31.866,81.529
USB_FS_PWR_EN: JP8.1 R59.1 SB91.2 U18.4 | length 51.5
  Top Layer w0.12: JP8.1@30.675,17.68 32.027,17.68 33.741,15.966 U18.4@33.741,13.624 33.746,13.629 R59.1@35.166,13.629
  Bottom Layer w0.12: JP8.1@30.675,17.68 34.152,17.68 34.714,18.242 34.714,44.51 41.491,51.287 41.491,54.829 SB91.2@41.291,55.029
USB_FS_VBUS: C91.2 CN13.1 R63.1 R65.1 U18.1 U21.1 | length 12.4
  Top Layer w0.3: CN13.1@26.223,4.539 26.223,5.411 27.341,6.529 U21.1@28.341,6.529 28.341,7.679 29.641,8.979 C91.2@30.741,8.979 30.741,9.604 30.991,9.854 R65.1@31.791,9.854 31.841,9.904 U18.1@31.841,11.029 ; R63.1@30.366,10.929 31.741,10.929 U18.1@31.841,11.029 ; U18.1@31.841,11.424 U18.1@31.841,11.029
VBAT: C63.2 SB83.2 U14.8 | length 3.6
  Top Layer w0.3: C63.2@33.566,58.854 33.611,58.854 33.871,59.114 v1(33.871,59.682) 33.918,59.729 33.918,60.831 U14.8@33.966,60.879
  Bottom Layer w0.3: SB83.2@32.966,58.629 33.466,59.129 33.466,59.256 33.871,59.66 v1(33.871,59.682)
VCAP: C54.2 C58.2 R35.1 SB75.1 U14.68 U14.103 U14.140 | length 57.1
  Top Layer w0.3: C58.2@25.266,65.304 25.296,65.274 26.427,65.274 26.457,65.304 v1@26.457,65.286 ; v1(26.457,65.245) v1@26.457,65.286 ; U14.140@28.391,64.954 26.789,64.954 v1@26.457,65.286 ; U14.103@32.966,82.529 32.966,81.304 34.3,79.97 35.12,79.97 v1(35.125,79.975) 39.402,79.975 41.002,78.375 U14.68@49.505,78.375 ; U14.68@50.041,78.454 v1(51.716,78.454) ; R35.1@52.766,78.029 52.141,78.029 v1(51.716,78.454) ; C54.2@52.766,79.029 52.291,79.029 v1(51.716,78.454)
  Signal Layer 2 w0.4: v1(26.457,65.245) 27.37,65.245 30.175,68.05 34.522,68.05 36.149,66.424 ; v1(35.125,79.975) 36.149,78.951 36.149,66.424 ; v1(35.694,66.029) v1@35.754,66.029 ; v1@35.754,66.029 v1(36.544,66.029) 36.149,66.424 ; v1@35.754,66.029 36.149,66.424
  Bottom Layer w0.5: 35.694,65.081 35.694,65.101 ; v1(35.694,66.029) 35.694,65.101 ; SB75.1@36.105,64.69 35.694,65.101 ; SB75.1@36.115,64.653 36.544,65.081 v1(36.544,66.029)
VDD_LDO: C51.1 C53.1 R34.1 SB25.1 SB76.1 U14.70 U14.105 U14.143 | length 73.6
  Top Layer w0.12: U14.105@31.966,82.529 31.966,80.769 33.21,79.525 39.15,79.525 40.9,77.775 v1(44.775,77.775) ; v1(44.8,78.9) 48.288,78.9 48.842,79.454 U14.70@50.041,79.454
  Top Layer w0.3: v1(26.666,63.753) 26.965,63.454 U14.143@28.391,63.454 ; U14.105@31.966,82.529 v1(31.966,83.779) 32.216,84.029 ; U14.70@50.041,79.454 51.266,79.454 51.791,79.979
  Top Layer w0.5: 32.216,84.029 32.391,84.204 R34.1@32.391,84.529 C51.1@33.316,84.529 ; 51.791,79.979 52.27,79.979 v1(52.32,80.029) C53.1@53.266,80.029
  Signal Layer 2 w0.12: v1(44.775,77.775) 44.788,77.788 44.788,78.888 v1(44.8,78.9)
  Signal Layer 2 w0.5: v1(26.666,63.753) 27.736,63.753 31.158,67.175 34.4,67.175 35.036,66.539 ; v1(34.271,65.954) v1@34.309,65.991 ; v1@34.309,65.991 34.999,65.991 v1(35.036,66.029) 35.036,66.539 ; v1@34.309,65.991 34.856,66.539 35.036,66.539
  Bottom Layer w0.2: v1(26.666,63.753) 27.37,64.457 27.37,80.195 30.954,83.779 v1(31.966,83.779)
  Bottom Layer w0.5: v1(34.271,65.954) 34.271,65.098 SB76.1@34.716,64.653 35.025,64.961 35.025,66.017 v1(35.036,66.029) ; v1(52.32,80.029) 51.925,80.424 51.925,83.138 52.466,83.679 52.666,83.679 SB25.1@52.966,83.379
VDD_SMPS_IN: C65.2 C68.2 SB74.2 SB92.1 U14.16 | length 10.7
  Top Layer w0.3: v1(37.616,62.544) 37.939,62.221 37.939,61.91 37.966,61.883 U14.16@37.966,60.879 37.966,59.854 38.516,59.304
  Top Layer w0.4: C65.2@38.516,58.779 38.516,59.304
  Top Layer w0.5: v1(38.516,56.679) 38.516,57.529 39.168,56.876 v1@39.168,56.776
  Top Layer w0.6: C68.2@38.516,57.529 C65.2@38.516,58.779
  Bottom Layer w0.3: v1@37.609,62.551 SB74.2@37.609,63.553
  Bottom Layer w0.5: v1@37.609,62.551 v1(37.616,62.544) ; v1(38.516,56.679) 38.516,56.294 38.741,56.069 38.741,55.729 ; SB92.1@38.741,55.529 38.741,55.729 ; v1(39.216,56.679) 39.216,56.204 38.741,55.729
VDD_SMPS_IND_OUT: C75.2 L1.2 SB79.2 | length 10.3
  Top Layer w0.5: v1(35.6,55.6) 36.395,55.6 L1.2@36.466,55.529 ; C75.2@36.466,54.479 L1.2@36.466,55.529 ; v1(37.516,54.679) 37.516,54.979 L1.2@36.716,55.779 L1.2@36.466,55.529
  Bottom Layer w0.6: SB79.2@36.066,60.629 37.516,59.179 v1(37.516,54.679)
VDD_SMPS_OUT: C64.2 L1.1 U14.15 | length 3.9
  Top Layer w0.3: 37.466,59.429 U14.15@37.466,60.879
  Top Layer w0.4: C64.2@37.166,58.779 37.166,59.129 37.466,59.429
  Top Layer w0.5: L1.1@36.716,57.279 L1.1@37.166,57.729
  Top Layer w0.6: L1.1@37.166,57.729 C64.2@37.166,58.779
VDDA: C61.1 C72.1 C73.2 R39.1 R40.2 U14.36 | length 8.9
  Top Layer w0.3: U14.36@48.066,60.879 48.066,60.129 49.466,58.729 R39.1@49.466,58.454 49.991,58.454 50.491,57.954 C73.2@50.491,57.204 C72.1@51.566,57.204 52.466,58.104 R40.2@52.466,58.329 52.466,58.954 C61.1@52.991,59.479
VFBSD: R33.1 R34.2 R35.2 U14.17 | length 46.3
  Top Layer w0.127: R34.2@32.391,85.429 32.35,85.47 v1(32.35,86.05) 32.35,86.588 R33.1@32.391,86.629 ; U14.17@38.466,60.879 v1(38.466,62.129) ; v1(51.7,75.5) 53.666,77.466 R35.2@53.666,78.029
  Signal Layer 1 w0.12: v1(32.35,86.05) 32.35,84.45 38.225,78.575 40.702,78.575 44.5,74.777 ; v1(38.45,66.225) 38.45,68.727 44.5,74.777 ; v1(51.7,75.5) 50.977,74.777 44.5,74.777
  Bottom Layer w0.127: v1(38.45,66.225) 38.512,66.163 38.512,65.822 38.55,65.784 38.55,65.556 38.436,65.442 38.436,62.159 v1(38.466,62.129)
VIN: C42.2 SW.2 U12.3 Vin5v.1 | length 49.5
  Top Layer w0.12: Vin5v.1@6.225,79.375 v2@6.225,82.155
  Top Layer w0.8: SW.2@4,82.025 6.095,82.025 6.225,82.155 v2(6.4,82.33) v2(6.4,83.225) ; v1@28.225,100.7 U12.3@28.225,101.8 ; U12.3@28.225,101.8 v1(29.6,101.8) v1(29.6,100.675) v1(28.225,100.675) v1(26.5,100.675) C42.2@26.5,101.82 28.205,101.82 U12.3@28.225,101.8
  Bottom Layer w0.8: v2(6.4,82.33) v2(6.4,83.225) 6.4,87.35 19.725,100.675 v1(26.5,100.675) v1(28.225,100.675) v1(29.6,100.675)
Vout: 5V.1 C3.1 L?.1 R1.2 SW.1 | length 31.5
  Top Layer w0.8: SW.1@4,85.025 5.1,85.025 6.7,86.625 8.875,86.625 10.7,84.8 ; R1.2@9.325,80.15 9.325,81.25 10.7,82.625 5V.1@10.7,83.7 10.7,84.8 ; C3.1@12.475,98.125 12.475,92.81 10.7,91.035 10.7,87.708 ; L?.1@14.4,88.575 11.567,88.575 10.7,87.708 ; 10.7,84.8 10.7,85.825 10.7,87.708
VREFP: C69.1 C71.2 R39.2 U14.35 | length 4.9
  Top Layer w0.3: C71.2@47.041,57.329 C69.1@48.116,57.329 48.066,57.379 R39.2@48.066,58.454 48.066,58.679 47.466,59.279 U14.35@47.466,60.879
WAKEUP_KEY: B1.3 B1.4 R67.2 R77.2 U23.1 | length 70.1
  Top Layer w0.12: B1.3@17.173,26.258 B1.4@17.173,16.758 18.767,16.758 19.529,15.996 R67.2@19.529,14.184 R67.2@19.426,14.184 ; U23.1@18.523,14.19 U23.1@18.516,14.184 R67.2@19.426,14.184 ; v1(27.85,13.525) 27.066,12.741 20.259,12.741 19.426,13.574 R67.2@19.426,14.184
  Bottom Layer w0.12: v1(27.85,13.525) 27.85,37.825 32.495,42.47 32.495,47.231 36.295,51.031 36.295,52.25 34.371,54.174 34.371,54.599 R77.2@34.366,54.604
pads on no net: CN13.11 CN13.12 J2.2 J2.MP1 J2.MP2 SW. SW.3 TJA1050.5 U11.3 U14.0 U17.4 U17.5 U17.12 U17.13 U19.5

## Polygon pours and split planes (outlines as drawn)
GND on Bottom Layer "GND_BOT" (solid, pour order 79): 60.711,2.493 60.711,1.8 cw(c58.711,1.8) 58.711,-0.2 1.936,-0.2 cw(c1.936,1.8) -0.064,1.8 -0.064,107.675 cw(c1.936,107.675) 1.936,109.675 58.711,109.675 cw(c58.711,107.675) 60.711,107.675
VDD_SMPS_IND_OUT on Bottom Layer "VDD_SMPS_IND_OUT_L04_P002" (solid, pour order 2): 34.966,60.879 34.966,54.279 37.966,54.279 37.966,60.879
SHGND on Bottom Layer "SHGND_L04_P056" (solid, remove dead copper, pour order 56): 39.741,17.725 57.469,17.725 57.469,0.4 39.841,0.4 39.741,0.404
1V2_MCU on Bottom Layer "1V2_MCU_L04_P010" (solid, pour order 10): 36.716,63.779 36.716,61.779 33.966,61.779 33.966,63.779
GND on Top Layer "GND_TOP" (solid, pour order 75): 60.711,2.493 60.711,1.8 cw(c58.711,1.8) 58.711,-0.2 1.936,-0.2 cw(c1.936,1.8) -0.064,1.8 -0.064,107.675 cw(c1.936,107.675) 1.936,109.675 58.711,109.675 cw(c58.711,107.675) 60.711,107.675
5V on Top Layer "5V_L01_P064" (solid, remove dead copper, pour order 64): 29.716,14.829 29.566,14.679 29.566,13.329 29.791,13.104 32.041,13.104 32.266,13.329 32.266,14.029 32.041,14.254 31.391,14.254 30.816,14.829
USB_FS_VBUS on Top Layer "USB_FS_VBUS_L01_P068" (solid, remove dead copper, pour order 68): 32.091,12.479 32.366,12.204 32.366,9.554 31.016,8.204 30.216,8.204 29.041,7.029 29.041,4.954 27.766,3.679 26.066,3.679 25.941,3.804 25.941,5.654 29.766,9.479 29.766,11.179 29.916,11.329 30.916,11.329 31.116,11.529 31.116,12.304 31.291,12.479
GND on Signal Layer 1 "GND_SIG1" (solid, pour order 78): 60.711,2.493 60.711,1.8 cw(c58.711,1.8) 58.711,-0.2 1.936,-0.2 cw(c1.936,1.8) -0.064,1.8 -0.064,107.675 cw(c1.936,107.675) 1.936,109.675 58.711,109.675 cw(c58.711,107.675) 60.711,107.675
GND on Signal Layer 2 "GND_sig2" (solid, pour order 80): 60.711,2.493 60.711,1.8 cw(c58.711,1.8) 58.711,-0.2 1.936,-0.2 cw(c1.936,1.8) -0.064,1.8 -0.064,107.675 cw(c1.936,107.675) 1.936,109.675 58.711,109.675 cw(c58.711,107.675) 60.711,107.675

## Keep-outs
Bottom Layer:
  rectangle: 41.475,86.204 43.041,87.5

## Other copper
Top Layer:
  pour cut-out: 33.7,23.35 40.466,23.35 40.466,0.4 33.7,0.4
  pour cut-out: 37.141,51.929 36.041,51.929 35.091,52.879 35.091,54.304 34.291,55.104 34.291,55.929 35.041,56.679 35.041,58.379 35.641,58.979 35.641,61.729 35.791,61.879 39.166,61.879 39.291,61.754 39.291,59.729 39.816,59.204 40.316,59.204 41.091,58.429 41.091,57.279 40.416,56.604 40.416,56.004 38.016,53.604 38.016,52.678 37.266,51.928
  pour cut-out: 39.466,17.75 57.466,17.75 57.466,0.279 39.466,0.279
Signal Layer 1:
  pour cut-out: 37.141,51.929 36.041,51.929 35.091,52.879 35.091,54.304 34.291,55.104 34.291,55.929 35.041,56.679 35.041,58.379 35.641,58.979 35.641,61.729 35.791,61.879 39.166,61.879 39.291,61.754 39.291,59.729 39.816,59.204 40.316,59.204 41.091,58.429 41.091,57.279 40.416,56.604 40.416,56.004 38.016,53.604 38.016,52.678 37.266,51.928
  pour cut-out: 39.466,17.75 57.466,17.75 57.466,0.279 39.466,0.279
  pour cut-out: 33.7,23.35 40.466,23.35 40.466,0.4 33.7,0.4
Signal Layer 2:
  pour cut-out: 37.141,51.929 36.041,51.929 35.091,52.879 35.091,54.304 34.291,55.104 34.291,55.929 35.041,56.679 35.041,58.379 35.641,58.979 35.641,61.729 35.791,61.879 39.166,61.879 39.291,61.754 39.291,59.729 39.816,59.204 40.316,59.204 41.091,58.429 41.091,57.279 40.416,56.604 40.416,56.004 38.016,53.604 38.016,52.678 37.266,51.928
  pour cut-out: 39.466,17.75 57.466,17.75 57.466,0.279 39.466,0.279
  pour cut-out: 34.225,23.425 40.466,23.425 40.466,0.4 34.225,0.4
Bottom Layer:
  pour cut-out: 36.641,20.1 39.575,20.1 39.575,0.4 36.641,0.4
  pour cut-out: 36.675,17.766 36.675,20.7 60.425,20.7 60.425,17.766
  pour cut-out: 60.559,0.4 57.625,0.4 57.625,20.625 60.559,20.625
Multi-Layer:
  pour cut-out: 40.541,28.725 40.541,17.759 50.366,17.759 50.366,28.725

## Silkscreen, mask and mechanical layers (free items; w line width, h text height)
Top Overlay:
  drawing of 14 lines, arcs and shapes, not listed
  text "5V_VIN" at 30.978,104.189 h1.5
  text "VIN" at 21.325,102.825 h1.5
  text "User LEDs" at 38.139,101.53 h1.5
  text "CANH" at 9.7,97.925 h0.6 r90
  text "CANL" at 9.625,89.95 h0.6 r90
  text "RMII TXD1" at 45.962,89.933 h1.5
  text "E" at 16.85,51.95 h14
  text "RMII MDIO" at 46.643,45.501 h1.5
  text "RESET" at 14.75,40.375 h1.5 r270
  text "USER" at 15.05,23.275 h1.5 r270
  text "-" at 1.175,9.375 h3
  text "+" at 10.425,9.375 h2.5
  text "User" at 17.305,2.129 h1.5
  text "USB" at 17.329,0.891 h1.5
  text "OVCR" at 30.358,0.729 h1.5
  text "VBUS" at 35.637,0.737 h1.5
Bottom Overlay:
  lines w0.12: 36.177,59.281 36.177,59.73
  lines w0.127: 34.975,16.85 34.975,25.85 59.975,25.85 59.975,16.85 34.975,16.85
  text "CN7" at 58.649,100.334 h1.5
  text "E" at 56.15,94.525 h14
  text "CN10" at 63.678,75.441 h1.5
  text "GND" at 12.75,33.575 h1.5 r270
M1-Board Shape:
  lines w0.1: -0.064,107.675 cw(c1.936,107.675) 1.936,109.675 58.711,109.675 cw(c58.711,107.675) 60.711,107.675 ; -0.064,107.7 -0.064,1.8 ccw(c1.936,1.8) 1.936,-0.2 ; 41.469,0.4 41.469,6.8 cw(c41.469,7.7) 40.569,7.7 cw(c41.469,7.7) 41.469,8.6 55.469,8.6 cw(c55.469,7.7) 56.369,7.7 ; 55.469,0.4 55.469,6.8 ; 60.711,107.7 60.711,1.8 cw(c58.711,1.8) 58.711,-0.2 ; 1.936,-0.2 58.711,-0.2 ; 1.936,-0.2 58.711,-0.2 ; 1.936,-0.2 58.711,-0.2 ; 1.936,-0.2 58.711,-0.2 ; 55.469,6.8 ccw(c55.469,6.8) 55.469,6.8 ; 55.469,6.8 ccw(c55.469,7.7) 56.369,7.7 ; 56.369,7.7 56.369,7.7
M5-Top Constraints:
  lines w0.2: 365.864,138.428 365.864,151.943 ; 365.864,141.943 455.364,141.943 ; 365.864,145.443 455.364,145.443 ; 365.864,158.24 365.864,171.755 ; 365.864,161.755 455.364,161.755 ; 365.864,165.255 455.364,165.255 ; 365.864,178.179 365.864,191.694 ; 365.864,181.694 455.364,181.694 ; 365.864,185.194 455.364,185.194 ; 365.869,138.428 455.369,138.428 ; 365.869,141.928 455.369,141.928 ; 365.869,158.24 455.369,158.24 ; 365.869,161.74 455.369,161.74 ; 365.869,178.179 455.369,178.179 ; 365.869,181.679 455.369,181.679 ; 366.614,153.693 391.614,153.693 ; 366.614,173.505 391.614,173.505 ; 366.614,193.444 391.614,193.444 ; 386.364,138.428 386.364,151.943 ; 386.364,158.24 386.364,171.755 ; 386.364,178.179 386.364,191.694 ; 396.864,138.428 396.864,151.943 ; 396.864,158.24 396.864,171.755 ; 396.864,178.179 396.864,191.694 ; 410.364,138.428 410.364,151.943 ; 410.364,158.24 410.364,171.755 ; 410.364,178.179 410.364,191.694 ; 427.364,138.428 427.364,151.943 ; 427.364,158.24 427.364,171.755 ; 427.364,178.179 427.364,191.694 ; 444.364,138.428 444.364,151.943 ; 444.364,158.24 444.364,171.755 ; 444.364,178.179 444.364,191.694 ; 455.364,138.428 455.364,151.943 ; 455.364,158.24 455.364,171.755 ; 455.364,178.179 455.364,191.694 ; 365.864,151.943 365.864,151.943 ; 365.864,151.943 365.864,157.193 455.364,157.193 455.364,151.943 ; 365.864,151.943 386.364,151.943 ; 365.864,171.755 365.864,171.755 ; 365.864,171.755 365.864,177.005 455.364,177.005 455.364,171.755 ; 365.864,171.755 386.364,171.755 ; 365.864,191.694 386.364,191.694 ; 365.864,191.694 365.864,196.944 455.364,196.944 455.364,191.694 ; 365.864,191.694 365.864,191.694 ; 386.364,151.943 396.864,151.943 ; 386.364,171.755 396.864,171.755 ; 386.364,191.694 396.864,191.694 ; 396.864,151.943 410.364,151.943 ; 396.864,171.755 410.364,171.755 ; 396.864,191.694 410.364,191.694 ; 410.364,151.943 427.364,151.943 ; 410.364,171.755 427.364,171.755 ; 410.364,191.694 427.364,191.694 ; 427.364,151.943 444.364,151.943 ; 427.364,171.755 444.364,171.755 ; 427.364,191.694 444.364,191.694 ; 444.364,151.943 455.364,151.943 ; 444.364,171.755 455.364,171.755 ; 444.364,191.694 455.364,191.694
  text "IMPEDANCE TABLE    RMII" at 366.614,193.944 h3
  text "LAYER" at 370.864,188.944 h3
  text "TRACE" at 387.114,188.944 h3
  text "SPACING" at 397.614,188.944 h3
  text "IMPEDANCE" at 411.114,188.944 h3
  text "IMPEDANCE" at 428.114,188.944 h3
  text "TOL." at 446.864,188.944 h3
  text "(mm)" at 400.939,186.469 h2.5
  text "(mm)" at 389.114,186.419 h2.5
  text "(Single ended)" at 411.614,186.194 h2.5
  text "(Differential)" at 429.364,186.194 h2.5
  text "+/- 15%" at 445.919,182.554 h3
  text "0.127" at 388.089,182.469 h3
  text "TOP/BOTTOM" at 367.094,182.429 h3
  text "n/a" at 400.114,182.444 h3
  text "50 ohm" at 414.469,182.379 h3
  text "n/a" at 434.019,182.329 h3
  text "+/- 15%" at 445.924,179.039 h3
  text "0.102" at 388.094,178.954 h3
  text "n/a" at 400.119,178.929 h3
  text "LAYER 3" at 369.039,178.894 h3
  text "50 ohm" at 414.474,178.864 h3
  text "n/a" at 434.024,178.814 h3
  text "IMPEDANCE TABLE    RD / RX / TD / TX" at 366.614,173.624 h3
  text "LAYER" at 370.864,169.005 h3
  text "TRACE" at 387.114,169.005 h3
  text "SPACING" at 397.614,169.005 h3
  text "IMPEDANCE" at 411.114,169.005 h3
  text "IMPEDANCE" at 428.114,169.005 h3
  text "TOL." at 446.864,169.005 h3
  text "(mm)" at 400.939,166.53 h2.5
  text "(mm)" at 389.114,166.48 h2.5
  text "(Single ended)" at 411.614,166.255 h2.5
  text "(Differential)" at 429.364,166.255 h2.5
  text "+/- 15%" at 445.919,162.615 h3
  text "0.130" at 388.089,162.53 h3
  text "TOP/BOTTOM" at 367.094,162.49 h3
  text "0.251" at 400.114,162.505 h3
  text "n/a" at 414.469,162.44 h3
  text "100 ohm" at 430.555,162.391 h3
  text "+/- 15%" at 445.924,159.1 h3
  text "0.104" at 388.094,159.015 h3
  text "0.277" at 400.119,158.99 h3
  text "LAYER 3" at 369.039,158.955 h3
  text "100 ohm" at 430.555,158.962 h3
  text "n/a" at 414.474,158.925 h3
  text "IMPEDANCE TABLE   USB FS, USB HS USER, USB HS STLINK" at 366.614,154.193 h3
  text "LAYER" at 370.864,149.193 h3
  text "TRACE" at 387.114,149.193 h3
  text "SPACING" at 397.614,149.193 h3
  text "IMPEDANCE" at 411.114,149.193 h3
  text "IMPEDANCE" at 428.114,149.193 h3
  text "TOL." at 446.864,149.193 h3
  text "(mm)" at 400.939,146.718 h2.5
  text "(mm)" at 389.114,146.668 h2.5
  text "(Single ended)" at 411.614,146.443 h2.5
  text "(Differential)" at 429.364,146.443 h2.5
  text "+/- 15%" at 445.919,142.803 h3
  text "0.155" at 388.089,142.718 h3
  text "TOP/BOTTOM" at 367.094,142.678 h3
  text "0.226" at 400.114,142.693 h3
  text "n/a" at 414.469,142.628 h3
  text "90 ohm" at 430.555,142.452 h3
  text "+/- 15%" at 445.924,139.288 h3
  text "0.130" at 388.094,139.203 h3
  text "0.251" at 400.119,139.178 h3
  text "LAYER 3" at 369.039,139.143 h3
  text "90 ohm" at 430.555,139.15 h3
  text "n/a" at 414.474,139.113 h3